# EAGLE board OLD_SpinningControls_4in_2_flipped (EAGLE 9.5.2)
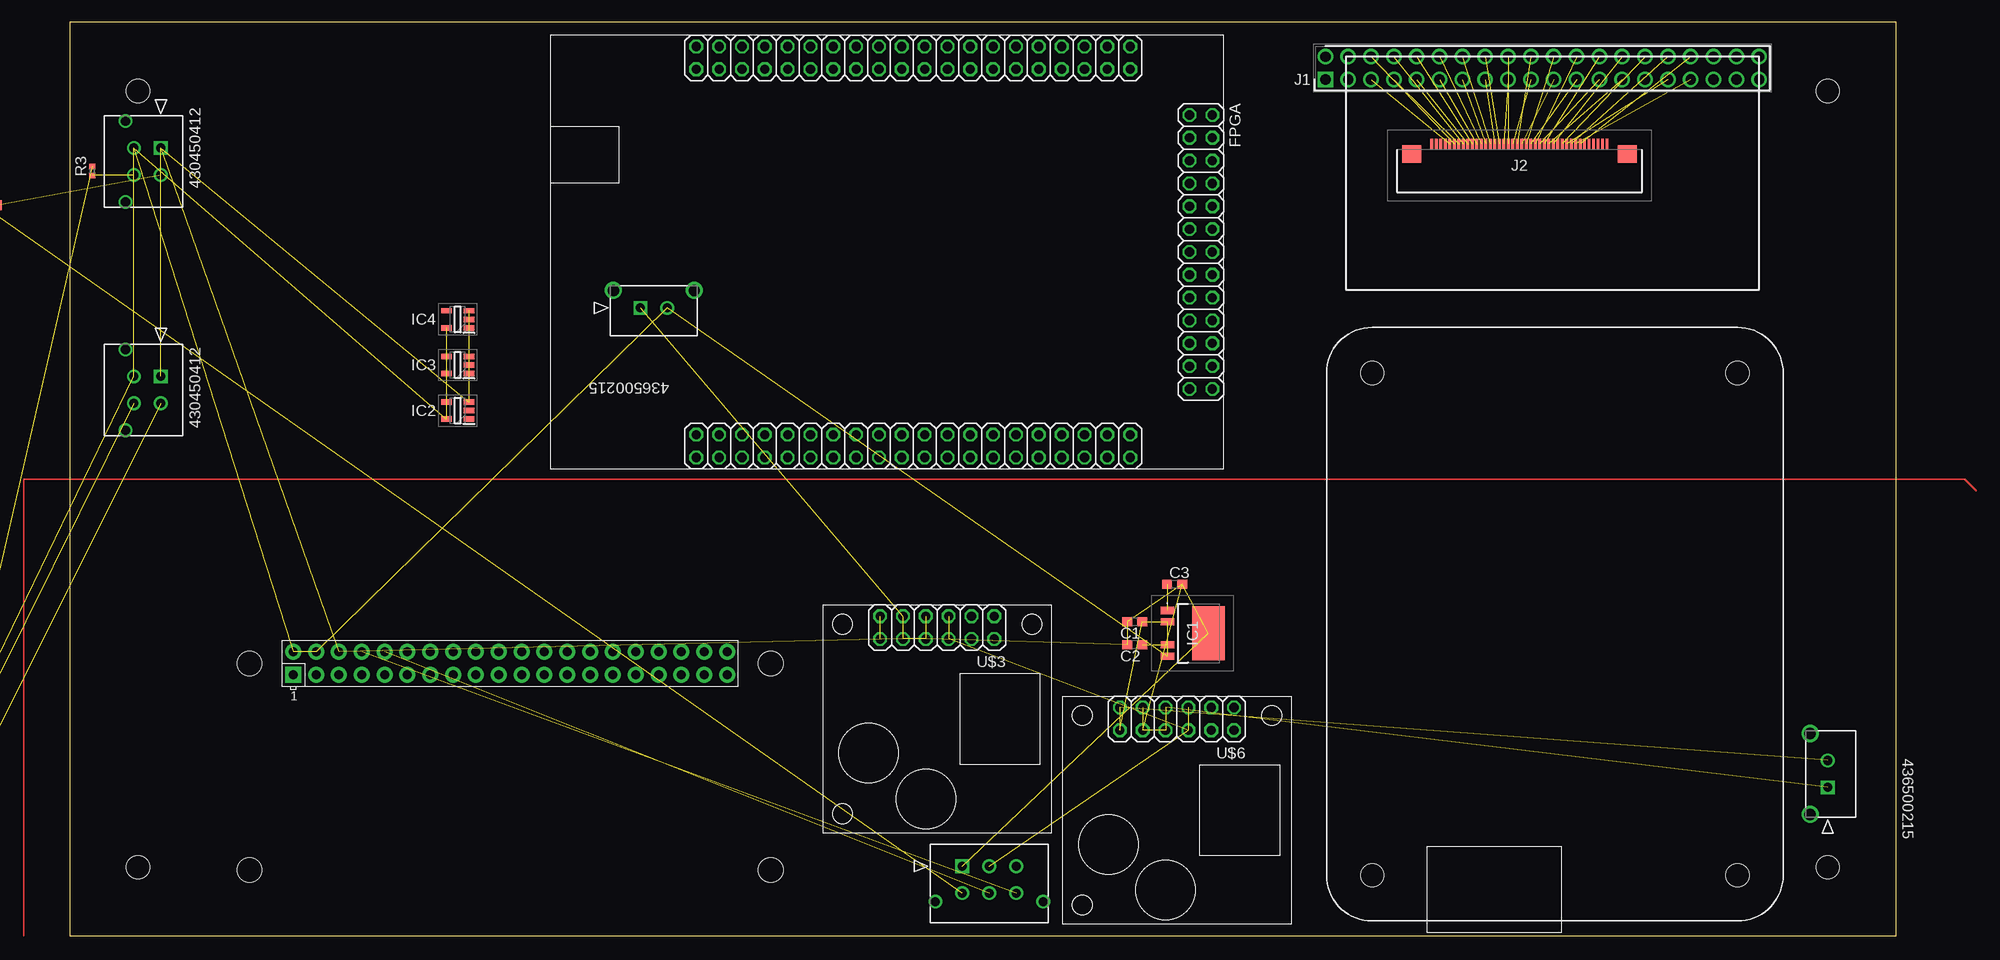
[diagram p0: board, top side]
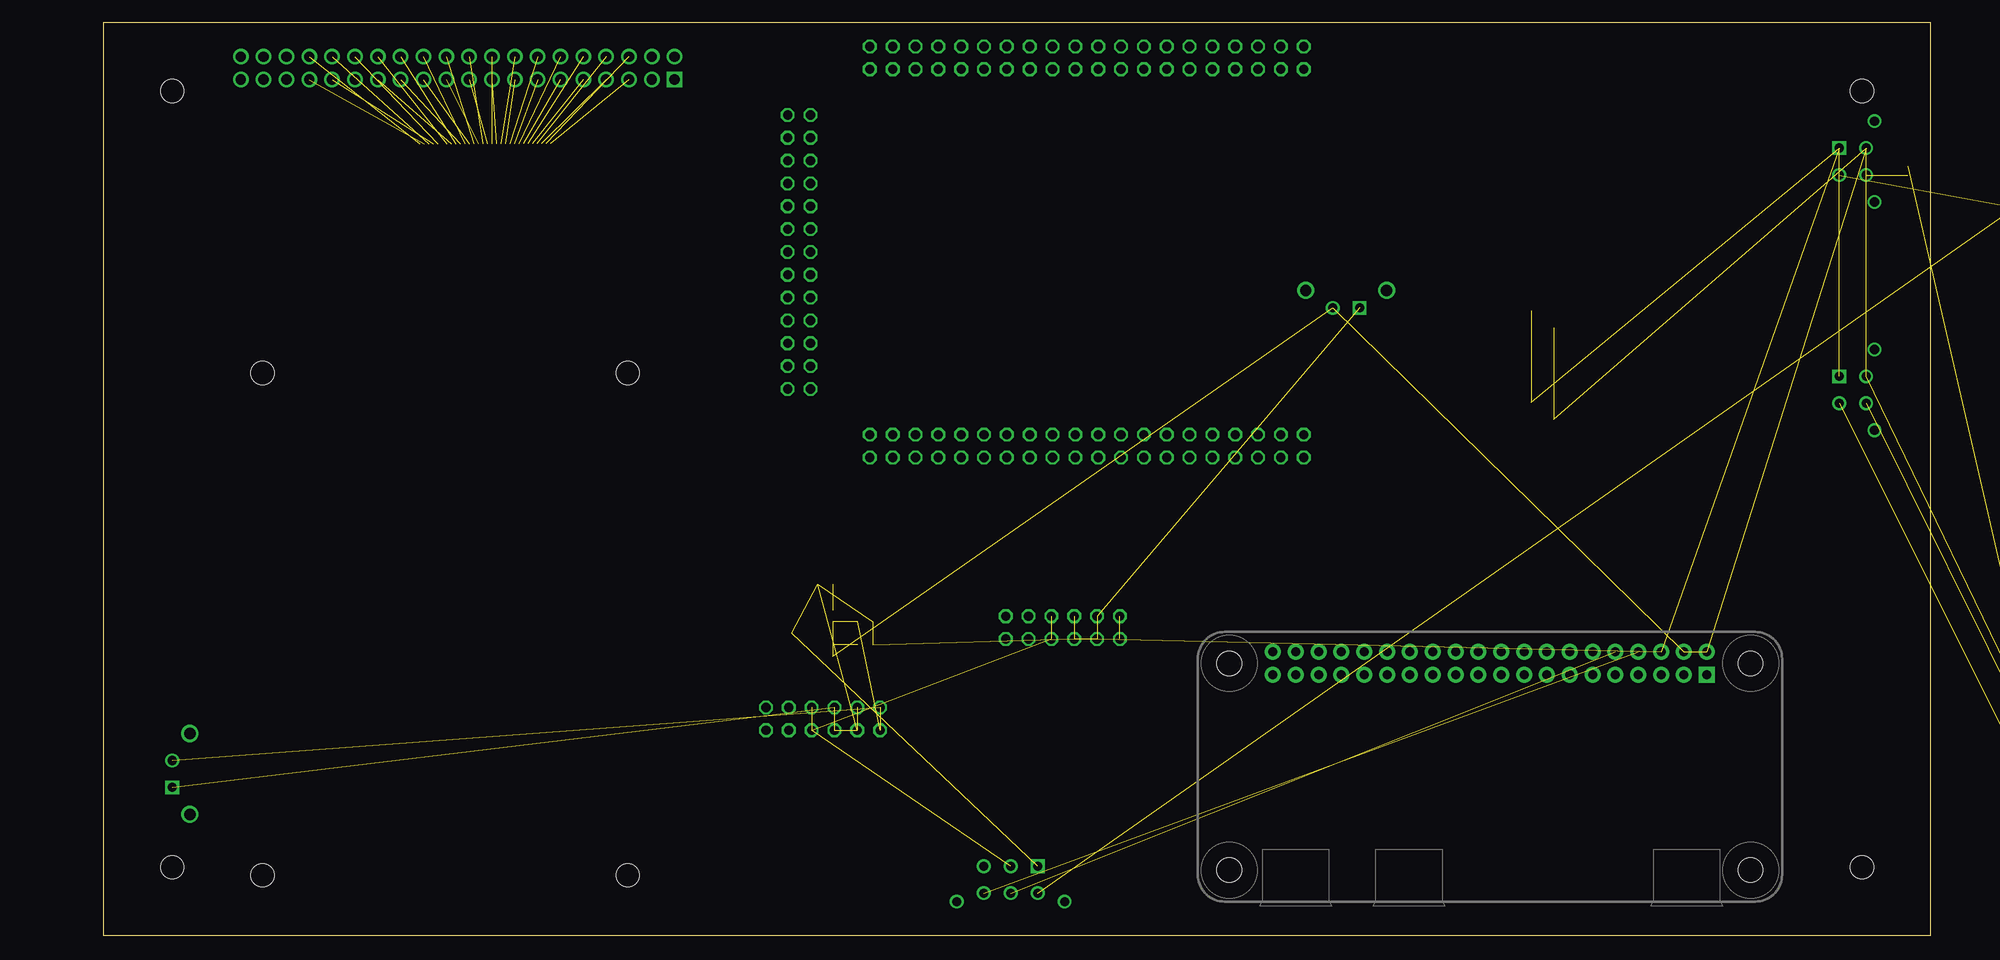
[diagram p1: board, bottom side, seen from below]

Size 203.2 x 101.6 mm. Coordinates in mm from the lower left corner, seen from the top.
Outline: 0,0 203.2,0 203.2,101.6 0,101.6 0,0
Copper layers (1*16): Top 0.035mm / dielectric 1.5mm / Bottom 0.035mm
Design rules "default": minimum track width 6mil, minimum drill 0.35mm, track to track 6mil, track to pad 6mil, pad to pad 6mil, via to via 6mil, smd to smd 6mil, copper to edge 40mil, drill to drill 6mil, minimum pad ring 10mil, minimum via ring 8mil, stop-mask expansion 4mil, vias tented up to drill 0mil, thermal gap 10mil
Holes 2.6 mm at 7.62,93.98 195.58,93.98 195.58,7.62 7.62,7.62

## Footprints (pad centres in the part's own frame; a part is rotated, then mirrored left to right if it is on the bottom)
C0603 = smd 1.1 x 1: 1 -0.85,0; 2 0.85,0
DE0-NANO = drill 1.016 octagon: 1 -20.32,10.414; 2 -22.86,10.414; 3 -20.32,12.954; 4 -22.86,12.954; 5 -20.32,15.494; 6 -22.86,15.494; 7 -20.32,18.034; 8 -22.86,18.034; 9 -20.32,20.574; 10 -22.86,20.574; 11 -20.32,23.114; 12 -22.86,23.114; 13 -20.32,25.654; 14 -22.86,25.654; 15 -20.32,28.194; 16 -22.86,28.194; 17 -20.32,30.734; 18 -22.86,30.734; 19 -20.32,33.274; 20 -22.86,33.274; 21 -20.32,35.814; 22 -22.86,35.814; 23 -20.32,38.354; 24 -22.86,38.354; 25 -20.32,40.894; 26 -22.86,40.894; 27 -20.32,43.434; 28 -22.86,43.434; 29 -20.32,45.974; 30 -22.86,45.974; 31 -20.32,48.514; 32 -22.86,48.514; 33 -20.32,51.054; 34 -22.86,51.054; 35 -20.32,53.594; 36 -22.86,53.594; 37 -20.32,56.134; 38 -22.86,56.134; 39 -20.32,58.674; 40 -22.86,58.674; 41 20.32,58.674; 42 22.86,58.674; 43 20.32,56.134; 44 22.86,56.134; 45 20.32,53.594; 46 22.86,53.594; 47 20.32,51.054; 48 22.86,51.054; 49 20.32,48.514; 50 22.86,48.514; 51 20.32,45.974; 52 22.86,45.974; 53 20.32,43.434; 54 22.86,43.434; 55 20.32,40.894; 56 22.86,40.894; 57 20.32,38.354; 58 22.86,38.354; 59 20.32,35.814; 60 22.86,35.814; 61 20.32,33.274; 62 22.86,33.274; 63 20.32,30.734; 64 22.86,30.734; 65 20.32,28.194; 66 22.86,28.194; 67 20.32,25.654; 68 22.86,25.654; 69 20.32,23.114; 70 22.86,23.114; 71 20.32,20.574; 72 22.86,20.574; 73 20.32,18.034; 74 22.86,18.034; 75 20.32,15.494; 76 22.86,15.494; 77 20.32,12.954; 78 22.86,12.954; 79 20.32,10.414; 80 22.86,10.414; 81 15.24,3.81; 82 15.24,1.27; 83 12.7,3.81; 84 12.7,1.27; 85 10.16,3.81; 86 10.16,1.27; 87 7.62,3.81; 88 7.62,1.27; 89 5.08,3.81; 90 5.08,1.27; 91 2.54,3.81; 92 2.54,1.27; 93 0,3.81; 94 0,1.27; 95 -2.54,3.81; 96 -2.54,1.27; 97 -5.08,3.81; 98 -5.08,1.27; 99 -7.62,3.81; 100 -7.62,1.27; 101 -10.16,3.81; 102 -10.16,1.27; 103 -12.7,3.81; 104 -12.7,1.27; 105 -15.24,3.81; 106 -15.24,1.27
S19246E33HV5T2U = smd 0.8 x 1.5: 1 -2.54,-3.475; 2 -1.27,-3.475; 4 1.27,-3.475; 5 2.54,-3.475 | smd 6 x 3.6: 3 0,1.075
SOT95P280X145-5N = smd 1.2 x 0.6: 1 -1.25,0.95; 2 -1.25,0; 3 -1.25,-0.95; 4 1.25,-0.95; 5 1.25,0.95
HDRV40W67P254_2X20_5039X488X81 = drill 1.15 pad 1.725 square: 1 0,0 | drill 1.15 pad 1.725: 2 0,2.54; 3 2.54,0; 4 2.54,2.54; 5 5.08,0; 6 5.08,2.54; 7 7.62,0; 8 7.62,2.54; 9 10.16,0; 10 10.16,2.54; 11 12.7,0; 12 12.7,2.54; 13 15.24,0; 14 15.24,2.54; 15 17.78,0; 16 17.78,2.54; 17 20.32,0; 18 20.32,2.54; 19 22.86,0; 20 22.86,2.54; 21 25.4,0; 22 25.4,2.54; 23 27.94,0; 24 27.94,2.54; 25 30.48,0; 26 30.48,2.54; 27 33.02,0; 28 33.02,2.54; 29 35.56,0; 30 35.56,2.54; 31 38.1,0; 32 38.1,2.54; 33 40.64,0; 34 40.64,2.54; 35 43.18,0; 36 43.18,2.54; 37 45.72,0; 38 45.72,2.54; 39 48.26,0; 40 48.26,2.54
F32R1A7H111040 = smd 0.3 x 1.1: 1 -9.75,3; 2 -9.25,3; 3 -8.75,3; 4 -8.25,3; 5 -7.75,3; 6 -7.25,3; 7 -6.75,3; 8 -6.25,3; 9 -5.75,3; 10 -5.25,3; 11 -4.75,3; 12 -4.25,3; 13 -3.75,3; 14 -3.25,3; 15 -2.75,3; 16 -2.25,3; 17 -1.75,3; 18 -1.25,3; 19 -0.75,3; 20 -0.25,3; 21 0.25,3; 22 0.75,3; 23 1.25,3; 24 1.75,3; 25 2.25,3; 26 2.75,3; 27 3.25,3; 28 3.75,3; 29 4.25,3; 30 4.75,3; 31 5.25,3; 32 5.75,3; 33 6.25,3; 34 6.75,3; 35 7.25,3; 36 7.75,3; 37 8.25,3; 38 8.75,3; 39 9.25,3; 40 9.75,3 | smd 2.1 x 1.95: MP1 -12,1.875; MP2 12,1.875
SULLINS_PPPC062LFBN-RC_0 = drill 1.02 pad 1.57 square: 1 -6.35,-1.27 | drill 1.02 pad 1.57: 2 -6.35,1.27; 3 -3.81,-1.27; 4 -3.81,1.27; 5 -1.27,-1.27; 6 -1.27,1.27; 7 1.27,-1.27; 8 1.27,1.27; 9 3.81,-1.27; 10 3.81,1.27; 11 6.35,-1.27; 12 6.35,1.27
CON_430450612_MOL = drill 1.016 pad 1.524 square: 1 0,0 | drill 1.016 pad 1.524: 2 -2.997,0; 3 -5.994,0; 4 0,2.997; 5 -2.997,2.997; 6 -5.994,2.997 | drill 1.016 pad 1.016: M1 2.997,3.937; M2 -8.992,3.937
CON_430450412_MOL = drill 1.016 pad 1.524 square: 1 0,0 | drill 1.016 pad 1.524: 2 -2.997,0; 3 0,2.997; 4 -2.997,2.997 | drill 1.016 pad 1.016: M1 2.997,3.937; M2 -5.994,3.937
CON_436500215_MOL = drill 1.016 pad 1.524 square: 1 0,0 | drill 1.016 pad 1.524: 2 -2.997,0 | drill 1.27 pad 1.27: M1 2.997,-1.956; M2 -5.994,-1.956
R0603 = smd 1 x 1.1: 1 -0.85,0; 2 0.85,0
R0402 = smd 0.6 x 0.7: 1 -0.5,0; 2 0.5,0
RASPBERRYPI_BASTELSTUBE_V13_RASPI_BOARD_B+_FULL = drill 1 pad 1.778 square: 1 8.37,25.23 | drill 1 pad 1.778: 2 8.37,27.77; 3 10.91,25.23; 4 10.91,27.77; 5 13.45,25.23; 6 13.45,27.77; 7 15.99,25.23; 8 15.99,27.77; 9 18.53,25.23; 10 18.53,27.77; 11 21.07,25.23; 12 21.07,27.77; 13 23.61,25.23; 14 23.61,27.77; 15 26.15,25.23; 16 26.15,27.77; 17 28.69,25.23; 18 28.69,27.77; 19 31.23,25.23; 20 31.23,27.77; 21 33.77,25.23; 22 33.77,27.77; 23 36.31,25.23; 24 36.31,27.77; 25 38.85,25.23; 26 38.85,27.77; 27 41.39,25.23; 28 41.39,27.77; 29 43.93,25.23; 30 43.93,27.77; 31 46.47,25.23; 32 46.47,27.77; 33 49.01,25.23; 34 49.01,27.77; 35 51.55,25.23; 36 51.55,27.77; 37 54.09,25.23; 38 54.09,27.77; 39 56.63,25.23; 40 56.63,27.77 | hole 2.75: 3.5,3.5; 3.5,26.5; 61.5,3.5; 61.5,26.5
TFP401 = hole 2.6: 5.461,-5.207; 5.461,-45.847; 61.341,-5.207; 61.341,-45.847
2X06 = drill 1.016 octagon: 1 -6.35,1.27; 2 -6.35,3.81; 3 -3.81,1.27; 4 -3.81,3.81; 5 -1.27,1.27; 6 -1.27,3.81; 7 1.27,1.27; 8 1.27,3.81; 9 3.81,1.27; 10 3.81,3.81; 11 6.35,1.27; 12 6.35,3.81

## Placement (x,y rotation side)
C1  4.7uF  [C0603]  118.49,34.92 180 top
C2  10nF  [C0603]  118.49,32.38 180 top
C3  4.7uF  [C0603]  122.94,39.12 0 top
FPGA  DE0-NANO  [DE0-NANO]  128.4,76.07 90 top
IC1  S-19246E33H-V5T2U  [S19246E33HV5T2U]  125.6,33.66 270 top
IC2  SN74LVC1G34DBVR  [SOT95P280X145-5N]  43.18,58.42 180 top
IC3  SN74LVC1G34DBVR  [SOT95P280X145-5N]  43.18,63.5 180 top
IC4  SN74LVC1G34DBVR  [SOT95P280X145-5N]  43.18,68.58 180 top
J1  7-146256-0  [HDRV40W67P254_2X20_5039X488X81]  139.7,95.25 0 top
J2  F32R-1A7H1-11040  [F32R1A7H111040]  161.29,85.09 0 top
J3  SULLINS_PPPC062LFBN-RCSULLINS_PPPC062LFBN-RC_0_0  [SULLINS_PPPC062LFBN-RC_0]  187.96,-12.7 0 bottom  (outside the outline)
J4  SULLINS_PPPC062LFBN-RCSULLINS_PPPC062LFBN-RC_0_0  [SULLINS_PPPC062LFBN-RC_0]  171.45,-12.7 0 bottom  (outside the outline)
J5  SULLINS_PPPC062LFBN-RCSULLINS_PPPC062LFBN-RC_0_0  [SULLINS_PPPC062LFBN-RC_0]  154.94,-12.7 0 bottom  (outside the outline)
J6  SULLINS_PPPC062LFBN-RCSULLINS_PPPC062LFBN-RC_0_0  [SULLINS_PPPC062LFBN-RC_0]  138.43,-12.7 0 bottom  (outside the outline)
J7  SULLINS_PPPC062LFBN-RCSULLINS_PPPC062LFBN-RC_0_0  [SULLINS_PPPC062LFBN-RC_0]  121.92,-12.7 0 bottom  (outside the outline)
J8  SULLINS_PPPC062LFBN-RCSULLINS_PPPC062LFBN-RC_0_0  [SULLINS_PPPC062LFBN-RC_0]  105.41,-12.7 0 bottom  (outside the outline)
J9  SULLINS_PPPC062LFBN-RCSULLINS_PPPC062LFBN-RC_0_0  [SULLINS_PPPC062LFBN-RC_0]  88.9,-12.7 0 bottom  (outside the outline)
J10  SULLINS_PPPC062LFBN-RCSULLINS_PPPC062LFBN-RC_0_0  [SULLINS_PPPC062LFBN-RC_0]  72.39,-12.7 0 bottom  (outside the outline)
J11  SULLINS_PPPC062LFBN-RCSULLINS_PPPC062LFBN-RC_0_0  [SULLINS_PPPC062LFBN-RC_0]  55.88,-12.7 0 bottom  (outside the outline)
J12  SULLINS_PPPC062LFBN-RCSULLINS_PPPC062LFBN-RC_0_0  [SULLINS_PPPC062LFBN-RC_0]  39.37,-12.7 0 bottom  (outside the outline)
J13  SULLINS_PPPC062LFBN-RCSULLINS_PPPC062LFBN-RC_0_0  [SULLINS_PPPC062LFBN-RC_0]  22.86,-12.7 0 bottom  (outside the outline)
J14  SULLINS_PPPC062LFBN-RCSULLINS_PPPC062LFBN-RC_0_0  [SULLINS_PPPC062LFBN-RC_0]  6.35,-12.7 0 bottom  (outside the outline)
J15  430450612  [CON_430450612_MOL]  99.31,7.75 180 top
J16  430450412  [CON_430450412_MOL]  10.16,62.23 90 top
J17  430450412  [CON_430450412_MOL]  10.16,87.63 90 top
J18  436500215  [CON_436500215_MOL]  195.58,16.51 270 top
J19  436500215  [CON_436500215_MOL]  63.5,69.85 180 top
R1  165 Ω  [R0603]  -11.43,17.78 180 top  (outside the outline)
R2  165 Ω  [R0603]  -8.89,81.28 180 top  (outside the outline)
R3  19.1k Ω  [R0402]  2.54,85.09 90 top
R5  19.1k Ω  [R0402]  -11.43,22.86 180 top  (outside the outline)
U$1  RPI-ZERO  [RASPBERRYPI_BASTELSTUBE_V13_RASPI_BOARD_B+_FULL]  16.51,3.81 0 top
U$2  TFP401  [TFP401]  139.7,1.27 90 top
U$3  3V3_BUCK_REGULATOR  [2X06]  96.52,36.83 180 top
U$6  5V_BUCK_REGULATOR  [2X06]  123.19,26.67 180 top

## Library data of the parts
C1-C3 = rcl; SPICEPREFIX: C
FPGA U$2 = VoxelEagleLib
IC1 = SamacSys_Parts; DESCRIPTION: LDO Voltage Regulators IC REG LINEAR 2000MA 3.3V; HEIGHT: 1.3mm; MANUFACTURER_NAME: ABLIC Inc.; MANUFACTURER_PART_NUMBER: S-19246E33H-V5T2U; MOUSER_PART_NUMBER: 628-S-19246E33HV5T2U; MOUSER_PRICE-STOCK: https://www.mouser.co.uk/ProductDetail/ABLIC/S-19246E33H-V5T2U?qs=DPoM0jnrROWX68Lwh%2F%252BJLQ%3D%3D
IC2-IC4 = SN74LVC1G34DBVR; ARROW_PART_NUMBER: SN74LVC1G34DBVR; ARROW_PRICE-STOCK: https://www.arrow.com/en/products/sn74lvc1g34dbvr/texas-instruments?region=nac; DESCRIPTION: Single Buffer Gate; HEIGHT: 1.45mm; MANUFACTURER_NAME: Texas Instruments; MANUFACTURER_PART_NUMBER: SN74LVC1G34DBVR; MOUSER_PART_NUMBER: 595-SN74LVC1G34DBVR; MOUSER_PRICE-STOCK: https://www.mouser.co.uk/ProductDetail/Texas-Instruments/SN74LVC1G34DBVR?qs=dT9u2OTAaVXXjYSQb2wcdg%3D%3D
J1 = SamacSys_Parts; DESCRIPTION: TE Connectivity AMPMODU Series, Series Number 7-146256, 2.54mm Pitch 40 Way 2 Row Straight PCB Header; HEIGHT: 8.13mm; MANUFACTURER_NAME: TE Connectivity; MANUFACTURER_PART_NUMBER: 7-146256-0; MOUSER_PART_NUMBER: 571-7-146256-0; MOUSER_PRICE-STOCK: https://www.mouser.co.uk/ProductDetail/TE-Connectivity/7-146256-0?qs=%2FDIRsAb2rQVdgdelqxc%2FCQ%3D%3D
J2 = F32R-1A7H1-11040; DESCRIPTION: FFC & FPC Connectors F32R-1A7H1-11040-Slider type; HEIGHT: 2.8mm; MANUFACTURER_NAME: Amphenol ICC / Aorora; MANUFACTURER_PART_NUMBER: F32R-1A7H1-11040; MOUSER_PART_NUMBER: 649-F32R-1A7H1-11040; MOUSER_PRICE-STOCK: https://www.mouser.co.uk/ProductDetail/Amphenol-ICC-Aorora/F32R-1A7H1-11040?qs=xZ%2FP%252Ba9zWqZi2ltQqa0C7A%3D%3D
J3-J14 = Sullins - PPPC062LFBN-RC; AUTOMOTIVE: No; CENTROID_NOT_SPECIFIED: No; CONN_GENDER: Female; CONN_ORIENTATION: Straight; CONTACT_MATERIAL: Gold,Nickel; CURRENT_RATING: 3A; DATASHEET: https://drawings-pdf.s3.amazonaws.com/10492.pdf; DEVICE_CLASS_L1: Connectors; DEVICE_CLASS_L2: Headers and Wire Housings; DEVICE_CLASS_L3: unset; DIGIKEY_DESCRIPTION: CONN HDR 12POS 0.1 GOLD PCB; DIGIKEY_PART_NUMBER: S7109-ND; FOOTPRINT_VARIANT_NAME_0: Recommended_Land_Pattern; HEIGHT: 8.65mm; IS_FEMALE: yes; LEAD_FREE: Yes; MF: Sullins; MFG_PACKAGE_IDENT: 0; MFG_PACKAGE_IDENT_DATE: 0; MFG_PACKAGE_IDENT_REV: 0; MPN: PPPC062LFBN-RC; NUMBER_OF_CONTACTS: 12; NUMBER_OF_ROWS: 2; PACKAGE: CONN_12; PITCH: 2.54mm; PREFIX: J; ROHS: Yes; TEMPERATURE_RANGE_HIGH: +105°C; TEMPERATURE_RANGE_LOW: -40°C; VERIFICATION_VERSION: 0.0.0.3; VOLTAGE_RATING: 250V
J15 = molex; COPYRIGHT: Copyright (C) 2022 Ultra Librarian. All rights reserved.; MANUFACTURER_PART_NUMBER: 430450612; MFR_NAME: Molex Connector Corporation
J16 J17 = molex; COPYRIGHT: Copyright (C) 2022 Ultra Librarian. All rights reserved.; MANUFACTURER_PART_NUMBER: 430450412; MFR_NAME: Molex Connector Corporation
J18 J19 = molex; COPYRIGHT: Copyright (C) 2022 Ultra Librarian. All rights reserved.; DIGI-KEY_PART_NUMBER_1: WM1917-ND; MANUFACTURER_PART_NUMBER: 436500215; MFR_NAME: Molex Connector Corporation
R1-R3 R5 = rcl; SPICEPREFIX: R
U$1 = RPI-Zero
U$3 U$6 = VoltageReg

## Nets
3V3_LED: U$3.11 U$3.12
3V3_LOGIC: C3.1 IC1.1
5V: C1.1 IC1.2 IC1.5 IC2.5 IC3.5 IC4.5 J16.3 J17.3 J18.2 J19.2 R3.2 R5.2 U$1.2 U$1.4 U$6.11 U$6.12
24V: J15.2 U$3.5 U$3.6 U$6.5 U$6.6
ACTIVE: J1.31 J2.31
B1: J1.21 J2.21
B2: J1.22 J2.22
B3: J1.23 J2.23
B4: J1.24 J2.24
B5: J1.25 J2.25
B6: J1.26 J2.26
B7: J1.27 J2.27
B8: J1.28 J2.28
DISPEN: J1.34 J2.34
ENC_POS: J15.4 R2.2
ENC_POS0: R1.2
G1: J1.13 J2.13
G2: J1.14 J2.14
G3: J1.15 J2.15
G4: J1.16 J2.16
G5: J1.17 J2.17
G6: J1.18 J2.18
G7: J1.19 J2.19
G8: J1.20 J2.20
GND: C1.2 C2.2 C3.2 IC1.3 IC2.3 IC3.3 IC4.3 J15.1 J16.1 J17.1 J18.1 J19.1 U$1.6 U$3.7 U$3.8 U$3.9 U$3.10 U$6.7 U$6.8 U$6.9 U$6.10
GSCLK: IC4.4
GSCLK_FPGA: IC4.2
HSYNC: J1.32 J2.32
LAT: IC2.4
LAT_FPGA: IC2.2
N$1: J16.4 R5.1
N$2: J17.4 R3.1
N$3: FPGA.11
N$4: C2.1 IC1.4
N$5: J16.2 R1.1
N$6: J17.2 R2.1
N$7: FPGA.12
N$9: FPGA.29
N$10: FPGA.30
N$11: FPGA.51
N$12: FPGA.69
N$13: FPGA.52
N$14: FPGA.70
N$15: FPGA.98
N$16: FPGA.100
N$17: FPGA.102
N$18: FPGA.104
N$19: FPGA.99
N$20: FPGA.101
N$21: FPGA.103
N$22: FPGA.105
N$23: FPGA.81
N$24: FPGA.106
PI_RX: J15.5 U$1.10
PI_TX: J15.6 U$1.8
PIXCLK: J1.30 J2.30
R1: J1.5 J2.5
R2: J1.6 J2.6
R3: J1.7 J2.7
R4: J1.8 J2.8
R5: J1.9 J2.9
R6: J1.10 J2.10
R7: J1.11 J2.11
R8: J1.12 J2.12
SCLK: IC3.4
SCLK_FPGA: IC3.2
VSYNC: J1.33 J2.33

## Tracks (layer width: path | path; a pad name or v marks a point on that pad's centre or on a via)
3V3_LED  (1 unrouted)
3V3_LOGIC  (1 unrouted)
5V  (15 unrouted)
24V  (4 unrouted)
ACTIVE  (1 unrouted)
B1  (1 unrouted)
B2  (1 unrouted)
B3  (1 unrouted)
B4  (1 unrouted)
B5  (1 unrouted)
B6  (1 unrouted)
B7  (1 unrouted)
B8  (1 unrouted)
DISPEN  (1 unrouted)
ENC_POS  (1 unrouted)
G1  (1 unrouted)
G2  (1 unrouted)
G3  (1 unrouted)
G4  (1 unrouted)
G5  (1 unrouted)
G6  (1 unrouted)
G7  (1 unrouted)
G8  (1 unrouted)
GND  (20 unrouted)
HSYNC  (1 unrouted)
N$1  (1 unrouted)
N$2  (1 unrouted)
N$4  (1 unrouted)
N$5  (1 unrouted)
N$6  (1 unrouted)
N$8
  Top 0.152: -5.08,0 -5.08,50.8 210.82,50.8 212.09,49.53
PI_RX  (1 unrouted)
PI_TX  (1 unrouted)
PIXCLK  (1 unrouted)
R1  (1 unrouted)
R2  (1 unrouted)
R3  (1 unrouted)
R4  (1 unrouted)
R5  (1 unrouted)
R6  (1 unrouted)
R7  (1 unrouted)
R8  (1 unrouted)
VSYNC  (1 unrouted)